# EAGLE board speaker (EAGLE 8.2.2)
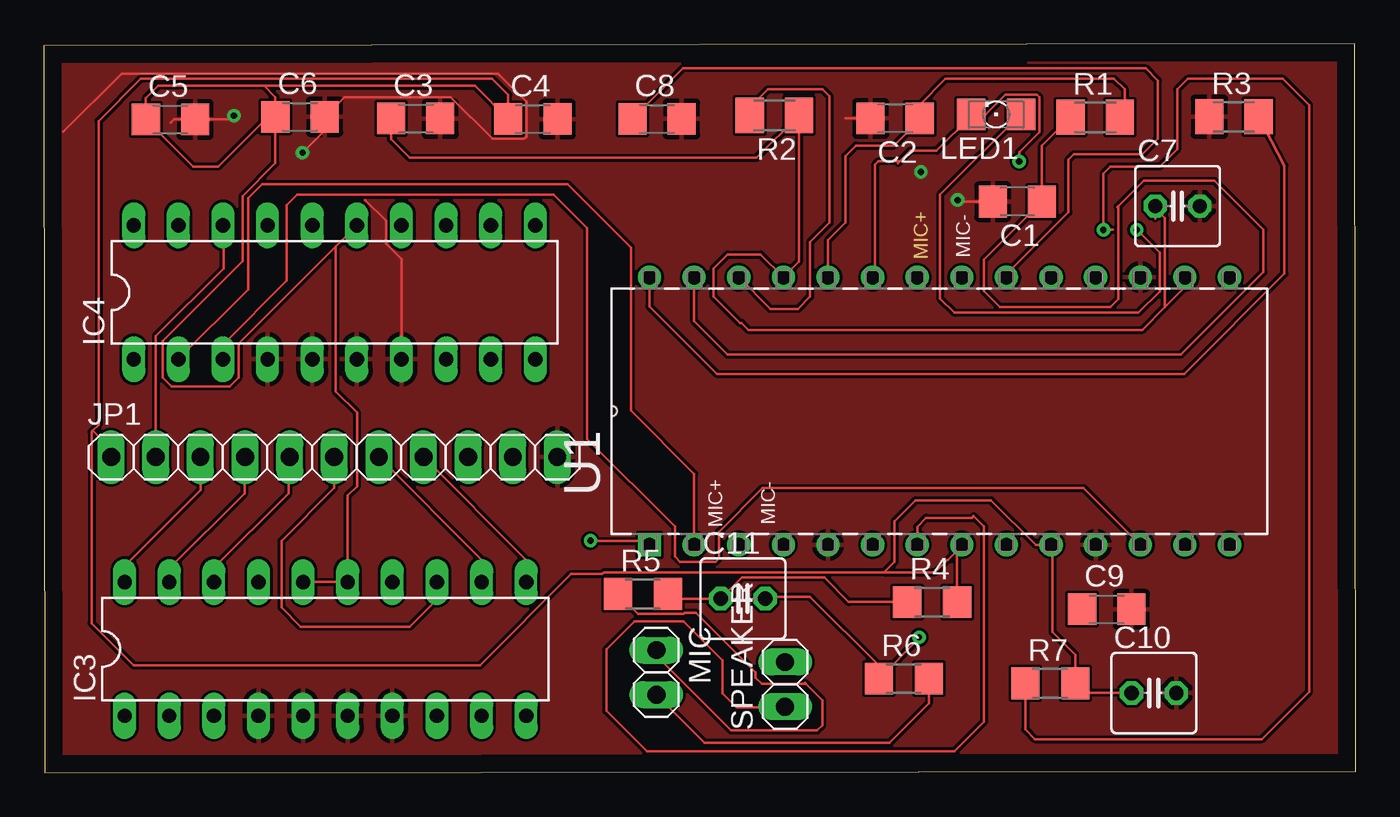
[diagram p0: board, top side]
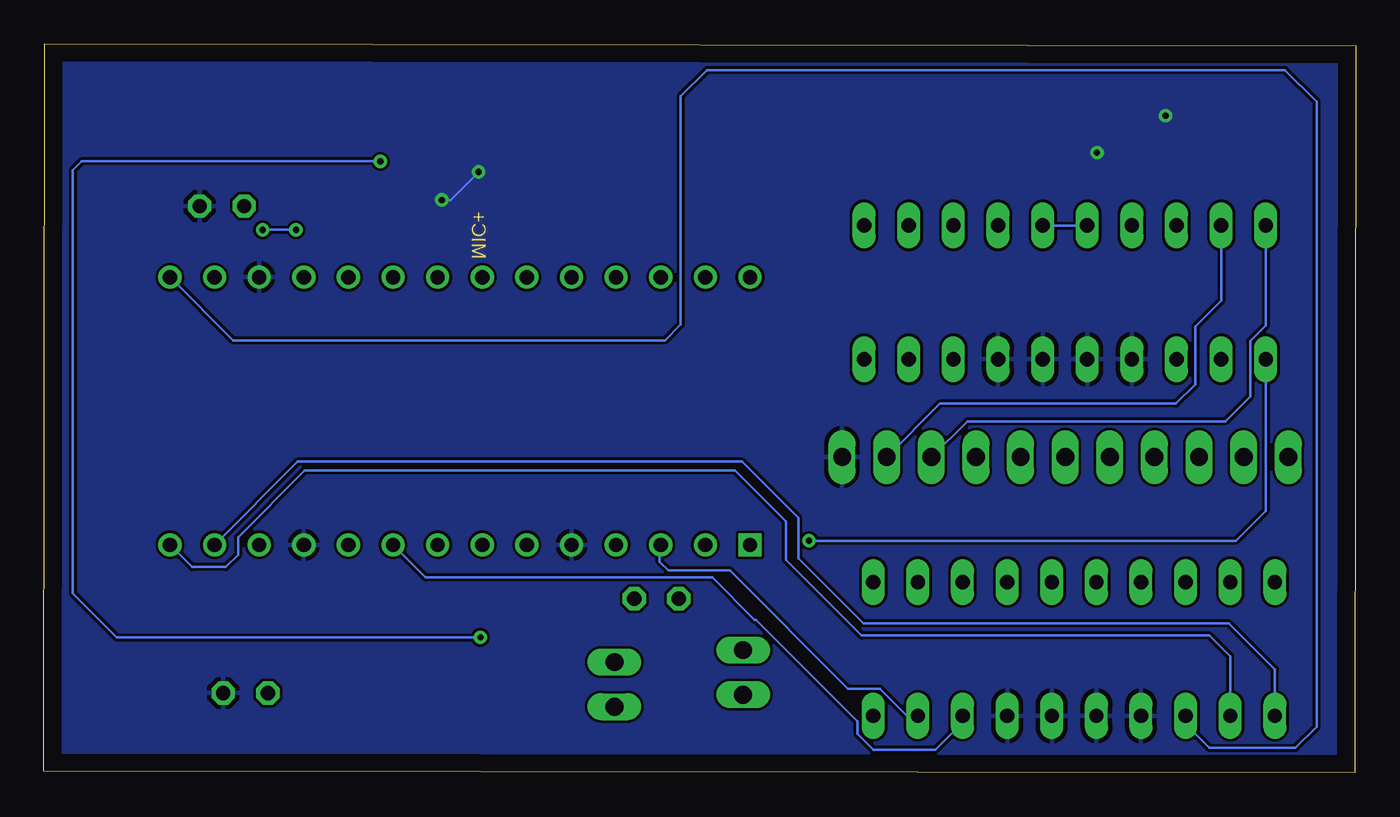
[diagram p1: board, bottom side, seen from below]

Size 74.67 x 41.51 mm. Coordinates in mm from the lower left corner, seen from the top.
Outline: 0.06,0 74.67,0.1 74.61,41.51 0,41.41 0.06,0
Copper layers (1*16): Top 0.035mm / dielectric 1.5mm / Bottom 0.035mm
Design rules "default": minimum track width 6mil, minimum drill 0.35mm, track to track 6mil, track to pad 6mil, pad to pad 6mil, via to via 6mil, smd to smd 6mil, copper to edge 40mil, drill to drill 6mil, minimum pad ring 10mil, minimum via ring 8mil, stop-mask expansion 4mil, vias tented up to drill 0mil, thermal gap 10mil

## Footprints (pad centres in the part's own frame; a part is rotated, then mirrored left to right if it is on the bottom)
C1206 = smd 1.6 x 1.8: 1 -1.4,0; 2 1.4,0
C025-050X050 = drill 0.813 octagon: 1 -1.27,0; 2 1.27,0
DIL20 = drill 0.813 long: 1 -11.43,-3.81; 2 -8.89,-3.81; 3 -6.35,-3.81; 4 -3.81,-3.81; 5 -1.27,-3.81; 6 1.27,-3.81; 7 3.81,-3.81; 8 6.35,-3.81; 9 8.89,-3.81; 10 11.43,-3.81; 11 11.43,3.81; 12 8.89,3.81; 13 6.35,3.81; 14 3.81,3.81; 15 1.27,3.81; 16 -1.27,3.81; 17 -3.81,3.81; 18 -6.35,3.81; 19 -8.89,3.81; 20 -11.43,3.81
1X11 = drill 1.016 long: 1 -12.7,0; 2 -10.16,0; 3 -7.62,0; 4 -5.08,0; 5 -2.54,0; 6 0,0; 7 2.54,0; 8 5.08,0; 9 7.62,0; 10 10.16,0; 11 12.7,0
1206 = smd 1.6 x 1.803: A -1.422,0; C 1.422,0
1X02 = drill 1.016 long: 1 -1.27,0; 2 1.27,0
M1206 = smd 1.6 x 2: 1 -1.4,0; 2 1.4,0
R1206 = smd 1.6 x 1.803: 1 -1.422,0; 2 1.422,0
DIP254P1525X550-28P = drill 0.813 pad 1.3 square: 1 -7.62,16.51 | drill 0.813 pad 1.3: 2 -7.62,13.97; 3 -7.62,11.43; 4 -7.62,8.89; 5 -7.62,6.35; 6 -7.62,3.81; 7 -7.62,1.27; 8 -7.62,-1.27; 9 -7.62,-3.81; 10 -7.62,-6.35; 11 -7.62,-8.89; 12 -7.62,-11.43; 13 -7.62,-13.97; 14 -7.62,-16.51; 15 7.62,-16.51; 16 7.62,-13.97; 17 7.62,-11.43; 18 7.62,-8.89; 19 7.62,-6.35; 20 7.62,-3.81; 21 7.62,-1.27; 22 7.62,1.27; 23 7.62,3.81; 24 7.62,6.35; 25 7.62,8.89; 26 7.62,11.43; 27 7.62,13.97; 28 7.62,16.51

## Placement (x,y rotation side)
C1  1n  [C1206]  55.42,32.52 180 top
C2  100n  [C1206]  48.46,37.26 180 top
C3  100n  [C1206]  21.16,37.26 0 top
C4  100n  [C1206]  27.83,37.23 0 top
C5  10u  [C1206]  7.21,37.21 0 top
C6  100n  [C1206]  14.58,37.36 0 top
C7  [C025-050X050]  64.54,32.27 0 top
C8  [C1206]  34.9,37.23 0 top
C9  [C1206]  60.5,9.32 0 top
C10  [C025-050X050]  63.19,4.55 0 top
C11  [C025-050X050]  39.8,9.92 0 top
IC3  74AC11004  [DIL20]  16.02,7.05 0 top
IC4  74AC11004  [DIL20]  16.54,27.36 0 top
JP1  [1X11]  16.53,17.98 0 top
LED1  [1206]  54.21,37.48 180 top
MIC  [1X02]  34.87,5.72 270 top
R1  4.7K  [M1206]  59.85,37.33 0 top
R2  47K  [M1206]  41.58,37.43 180 top
R3  100k  [M1206]  67.75,37.36 0 top
R4  [R1206]  50.56,9.72 0 top
R5  [R1206]  34.1,10.19 0 top
R6  [R1206]  48.95,5.36 0 top
R7  [R1206]  57.29,5.09 0 top
SPEAKER  [1X02]  42.19,5.04 90 top
U1  APR9600_DIP-28  [DIP254P1525X550-28P]  50.98,20.6 90 top

## Library data of the parts
C1-C11 R1-R3 = rcl
IC3 IC4 = 74ac-logic
JP1 MIC SPEAKER = pinhead
LED1 = adafruit
R4-R7 = resistor
U1 = aplus; MPN: APR9600_DIP-28; OC_FARNELL: unknown; OC_NEWARK: unknown; PACKAGE: DIP-28; SUPPLIER: APLUS INTEGRATED CIRCUITS INC

## Nets
APR_1_M6: IC4.1 U1.1
APR_2_M7: IC4.2 U1.2
APR_3_M4: IC3.9 U1.3
APR_4_M5: IC3.10
APR_9_M3: IC3.8 U1.9
APR_12_REC: IC4.3 U1.12
APR_13_M0: IC3.1 U1.13
APR_14_M1: IC3.2 U1.14
APR_15_M2: IC3.3 U1.15
GND: C1.2 C2.2 C3.2 C4.2 C5.2 C6.2 C7.2 C8.2 C9.2 C10.2 IC3.4 IC3.5 IC3.6 IC3.7 IC4.4 IC4.5 IC4.6 IC4.7 JP1.11 R3.1 U1.5 U1.11 U1.17
INVERT_A2_M7_SPEAKER: IC4.19 JP1.10
INVERT_A3_M6_SPEAKER: IC4.20 JP1.9
INVERT_A4_M5_SPEAKER: IC3.11 JP1.8
INVERT_A5_M4_SPEAKER: IC3.12 JP1.7
INVERT_A6_M3_SPEAKER: IC3.13 JP1.6
INVERT_A7_M2_SPEAKER: IC3.18 JP1.5
INVERT_H3_M1_SPEAKER: IC3.19 JP1.4
INVERT_H4_M0_SPEAKER: IC3.20 JP1.3
INVERT_H4_REC: IC4.18 JP1.2
MIC+: U1.22
MIC-: U1.21
MICG: C11.2 LED1.C R6.1 U1.23
N$6: C11.1 R4.1 R5.2
N$7: MIC.1 R5.1
N$8: MIC.2 R6.2
N$10: LED1.A R7.1
ROSC: R2.2 U1.26
RSTB: C1.1 R1.1 U1.27
SRSTB: R3.2 U1.28
VCC: C4.1 C5.1 C6.1 C10.1 IC3.15 IC3.16 IC4.15 IC4.16 JP1.1 R4.2 R7.2 U1.8 U1.10
VCM: C8.1 U1.20
VDDL: C2.1 R1.2 U1.24
VLDO: C3.1 C7.1 R2.1 U1.16 U1.25
VOUT1: SPEAKER.1 U1.7
VOUT2: SPEAKER.2
VREF: C9.1

## Tracks (layer width: path | path; a pad name or v marks a point on that pad's centre or on a via)
APR_1_M6  (via drill 0.35)
  Top 0.152: v31.11,13.22 34.24,13.22 U1.1
  Bottom 0.152: IC4.1 5.12,14.92 6.82,13.22 v31.11,13.22
APR_2_M7
  Top 0.152: U1.2 37.01,17.02 33.42,20.62 33.42,29.92 29.82,33.52 12.42,33.52 11.62,32.72 11.62,27.51 IC4.2
APR_3_M4
  Bottom 0.152: IC3.9 25.54,3.24 27.09,4.79 28.89,4.79 35.62,11.52 39.12,11.52 39.62,12.02 39.62,12.92 U1.3
APR_9_M3
  Bottom 0.152: IC3.8 22.38,2.86 23.92,1.32 27.45,1.32 28.34,2.21 28.34,2.94 34.12,8.72 34.22,8.72 36.62,11.12 52.93,11.12 U1.9
APR_12_REC
  Top 0.152: IC4.3 10.2,24.39 13.82,28.02 13.82,32.32 14.42,32.92 29.02,32.92 30.92,31.02 30.92,19.02 35.92,14.02 35.92,12.32 36.22,12.02 38.22,12.02 38.42,12.22 38.42,13.72 40.92,16.22 59.18,16.22 U1.12
APR_13_M0
  Bottom 0.152: IC3.1 4.59,5.89 7.22,8.52 28.02,8.52 31.72,12.22 31.72,14.52 34.92,17.72 60.22,17.72 U1.13
APR_14_M1
  Bottom 0.152: IC3.2 7.13,6.63 8.32,7.82 28.12,7.82 32.42,12.12 32.42,14.32 35.32,17.22 59.82,17.22 63.62,13.42 63.62,12.42 64.32,11.72 66.23,11.72 U1.14
APR_15_M2
  Bottom 0.152: IC3.3 9.67,2.77 8.32,1.42 3.42,1.42 2.22,2.62 2.22,38.22 4.02,40.02 36.92,40.02 38.42,38.52 38.42,25.52 39.32,24.62 63.89,24.62 U1.15
GND  (via drill 0.35)
  Top 0.152: 45.62,37.26 C2.2 | C1.2 52.11,32.52 v52.02,32.62 | v14.72,35.32 15.98,36.58 C6.2 17.11,38.48 23.15,38.48 25.54,36.1 27.33,36.1 27.46,36.23 27.46,38.22 25.86,39.82 4.42,39.82 1.1,36.5 | 7.22,37.02 7.41,37.21 C5.2 10.61,37.21 v10.82,37.42 | IC4.7 20.36,29.25 19.47,30.14 19.47,31.44 18.29,32.61
  Bottom 0.152: v52.02,32.62 51.52,32.62 v49.92,34.22
  pour Top: -3.28,-3.38 79.32,-3.38 79.52,-3.18 79.52,44.32 79.22,44.62 -3.28,44.62
  pour Bottom: -1.48,-1.68 77.12,-1.68 77.12,43.32 76.92,43.12 -1.48,43.12
INVERT_A2_M7_SPEAKER
  Bottom 0.152: IC4.19 7.65,26.88 9.12,25.42 9.12,22.12 10.22,21.02 23.65,21.02 JP1.10
INVERT_A3_M6_SPEAKER
  Bottom 0.152: IC4.20 5.12,25.47 6,24.58 6,21.43 7.42,20.02 22.11,20.02 JP1.9
INVERT_A4_M5_SPEAKER
  Top 0.152: IC3.11 27.45,12.13 JP1.8
INVERT_A5_M4_SPEAKER
  Top 0.152: IC3.12 24.91,12.13 JP1.7
INVERT_A6_M3_SPEAKER
  Top 0.152: IC3.13 22.38,9.87 20.82,8.32 14.62,8.32 13.52,9.42 13.52,13.22 16.52,16.22 JP1.6
INVERT_A7_M2_SPEAKER
  Top 0.152: IC3.18 9.67,11.67 13.92,15.92 13.92,17.91 JP1.5
INVERT_H3_M1_SPEAKER
  Top 0.152: IC3.19 7.13,11.63 11.42,15.92 11.42,17.95 JP1.4
INVERT_H4_M0_SPEAKER
  Top 0.152: IC3.20 4.59,11.79 8.92,16.12 JP1.3
INVERT_H4_REC
  Top 0.152: JP1.2 6.37,24.87 10.22,28.72 10.22,31.14 IC4.18
MICG  (via drill 0.35)
  Top 0.152: 47.17,28.37 U1.23 47.32,28.37 47.32,34.62 47.52,34.82 48.72,34.82 | C11.2 41.17,10.02 43.62,10.02 47.52,6.11 R6.1 49.82,7.66 v49.82,7.72 | 48.72,34.82 49.32,35.42 50.82,35.42 52.78,37.38 LED1.C 53.6,37.48 54.73,38.61 56.52,38.61 56.66,38.48 56.66,36.48 55.52,35.35 v55.52,34.82 | 48.72,34.82 48.62,34.72
  Bottom 0.152: v55.52,34.82 72.52,34.82 73.02,34.32 73.02,10.22 70.52,7.72 v49.82,7.72
N$6
  Top 0.152: R5.2 35.79,9.92 C11.1 39.73,11.12 44.42,11.12 45.81,9.72 R4.1
N$7
  Top 0.152: MIC.1 34.87,6.67 39.12,2.42 44.02,2.42 44.32,2.72 44.32,4.12 43.37,5.07 | 43.37,5.07 43.32,5.12 | 43.37,5.07 40.87,5.07 40.52,5.42 40.52,5.72 37.12,9.12 36.48,9.12 36.42,9.06 33.81,9.06 R5.1
N$8
  Top 0.152: R6.2 50.37,3.97 48.12,1.72 37.59,1.72 MIC.2
N$10  (via drill 0.35)
  Top 0.152: R7.1 55.87,2.47 56.42,1.92 69.32,1.92 72.02,4.62 72.02,38.02 70.52,39.52 65.12,39.52 64.52,38.92 64.52,35.52 63.52,34.52 60.72,34.52 60.32,34.12 v60.32,30.92 60.86,30.92 | LED1.A 55.58,37.48 51.02,32.92 51.02,27.02 51.82,26.22 54.29,26.22 54.29,26.21 62.31,26.21 63.51,27.41 63.51,29.62 v62.22,30.92
  Bottom 0.152: v62.22,30.92 61.02,30.92 | 61.02,30.92 60.42,30.92 | 61.02,30.92 v60.32,30.92
ROSC
  Top 0.152: R2.2 40.18,37.88 41.22,38.92 44.32,38.92 44.72,38.52 44.72,31.32 43.62,30.22 43.62,27.12 42.92,26.42 41.36,26.42 U1.26
RSTB
  Top 0.152: 37.01,25.72 37.02,25.72 | 37.02,25.72 38.92,23.82 64.72,23.82 69.42,28.52 69.42,30.92 66.62,33.72 62.62,33.72 61.17,32.27 | 61.12,32.22 61.17,32.27 | R1.1 56.82,35.7 C1.1 53.52,29.22 53.52,27.42 54.42,26.52 60.72,26.52 61.17,26.97 61.17,32.27 | 37.02,25.72 U1.27
SRSTB
  Top 0.152: U1.28 34.47,26.56 38.32,22.72 64.92,22.72 70.62,28.42 70.62,34.58 R3.2
VCC
  Top 0.152: IC3.16 IC3.15 17.29,15.79 17.82,16.32 17.82,20.52 16.62,21.72 16.62,29.97 IC4.15 11.08,24.44 11.08,22.52 10.56,22 7.29,22 6.77,22.52 6.77,24.58 11.31,29.12 11.31,32.84 13.18,34.71 C6.1 | 5.81,37.26 5.81,38.4 6.52,39.12 12.54,39.12 | 12.54,39.12 24.54,39.12 C4.1 26.43,38.6 25.52,39.52 5.52,39.52 3.12,37.12 3.12,19.82 2.78,19.48 | 12.54,39.12 13.18,38.48 C6.1 | R4.2 51.99,12.42 52.25,12.69 52.25,12.9 | C10.1 59.26,4.55 R7.2 58.71,6.73 57.42,8.02 57.42,12.71 57.15,12.98 | 2.78,19.48 2.72,19.42 2.72,8.52 5.12,6.12 24.82,6.12 30.02,11.32 31.78,11.32 31.89,11.42 47.82,11.42 | 47.82,11.42 50.62,11.42 | 50.62,11.42 50.7,11.42 | 47.82,11.42 48.42,12.02 48.42,14.32 49.62,15.52 53.92,15.52 56.45,12.98 57.15,12.98 | U1.10 57.15,12.98 | C6.1 12.76,37.36 9.92,34.52 8.5,34.52 C5.1 | JP1.1 3.83,18.43 2.78,19.48 | 50.62,11.42 50.72,11.42 51.42,12.12 51.47,12.12 52.25,12.9 | 52.25,12.9 U1.8
  Bottom 0.152: IC4.15 IC4.16
VCM
  Top 0.152: 55.42,28.22 U1.20 54.79,28.39 58.32,31.92 58.32,34.92 58.62,35.22 62.52,35.22 63.42,36.12 63.42,39.42 62.72,40.12 36.38,40.12 C8.1
VDDL
  Top 0.152: 49.86,37.19 C2.1 49.86,38.05 51.32,39.52 60.92,39.52 61.52,38.92 61.52,37.36 R1.2 | 49.82,37.23 49.86,37.19 | U1.24 44.63,30.33 45.62,31.32 45.62,35.12 46.22,35.72 48.38,35.72 49.86,37.19
VLDO
  Top 0.152: C3.1 19.76,36.07 20.82,35.02 40.57,35.02 R2.1 42.98,29.11 U1.25 40.8,29.52 38.92,29.52 38.12,28.72 38.12,27.12 39.62,25.62 39.72,25.62 40.12,25.22 62.52,25.22 63.82,26.52 | 63.27,32.14 C7.1 | 63.27,32.14 63.27,31.56 | 63.82,26.52 63.82,31.58 63.27,32.14 | U1.16 64.95,27.65 63.82,26.52
VOUT1
  Top 0.152: U1.7 49.71,14.01 50.22,14.52 52.82,14.52 52.92,14.62 53.52,14.02 53.52,2.92 51.82,1.22 34.32,1.22 32.02,3.52 32.02,7.02 33.62,8.62 36.42,8.62 38.62,6.42 38.62,4.52 39.42,3.72 42.14,3.72 SPEAKER.1

## Text on the board
Dimension: MIC+
tNames: MIC- | MIC+ | MIC-